# Altium PCB Grabber_DIOT.PCBDOC (part 4 of 7)
Units mm, origin at the board's own origin, x right, y up, seen from the top; angles counter-clockwise.
Board outline 222.9 x 100 mm, 4 copper layers (L1, P2, P3, L4), stack 1.6 mm thick; 235 components, 180 nets, 1032 pads, 664 vias.
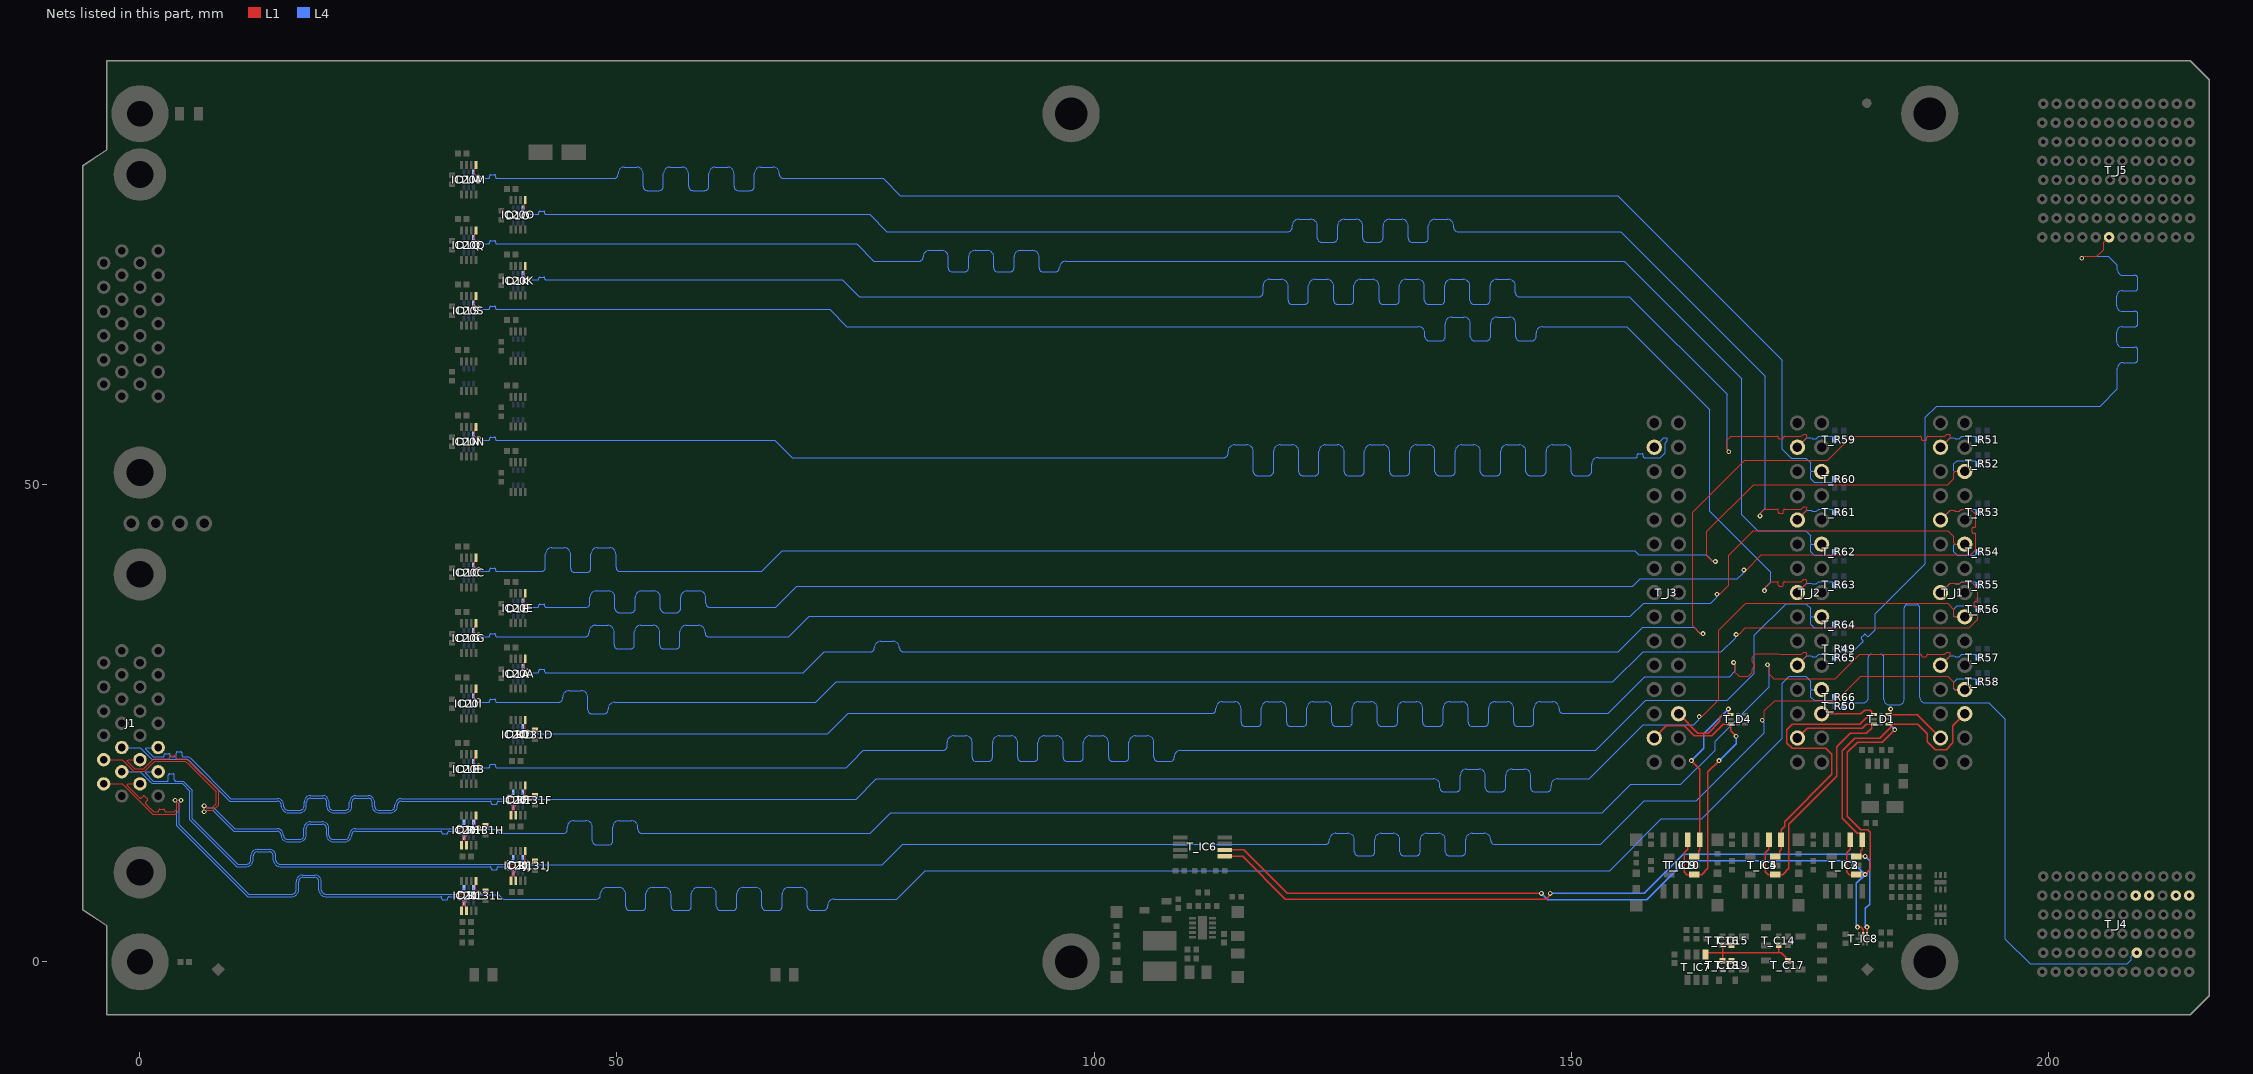
[diagram p5: the nets of this part, all layers, seen from the top]

## Via types
v1: diameter 0.5, hole 0.25, L1 to L4, tented both sides, 661 vias
v2: diameter 0.5, hole 0.25, L1 to L4, 3 vias

## Nets (pads, with @x,y where several pads share a name; then routed paths per layer and width w, separated by ;. In a path a pad name is that pad's centre, name@x,y a point inside that pad or via, vN(x,y) a via of type N, cw(c..) or ccw(c..) an arc to the next point about the centre after c; other vN are vias at no path point) (continued)
BP_IO.LVDS_P14: T_J5.G1 T_R49.1 | length 83.2
  L1 w0.127: v1(203.531,73.752) 203.606,73.752 203.792,73.937 204.092,73.937 204.093,73.936 205.115,73.936 205.827,74.648 205.827,75.377 205.852,75.402 T_J5.G1@206.4,75.95
  L4 w0.127: T_R49.1@178.608,32.82 178.835,32.593 178.835,32.551 178.909,32.477 179.549,32.477 180.545,33.472 180.589,33.517 ccw(c180.5,33.607) 180.589,33.697 180.445,33.841 cw(c180.534,33.93) 180.445,34.019 180.711,34.285 cw(c180.8,34.196) 180.888,34.285 181.033,34.14 ccw(c181.123,34.23) 181.212,34.14 181.617,34.545 181.897,34.824 181.897,36.498 187.121,41.722 187.121,57.068 188.313,58.26 205.495,58.26 207.28,60.045 207.28,60.946 207.28,62.228 cw(c207.859,62.228) 207.859,62.807 209.095,62.807 ccw(c209.095,63.132) 209.421,63.132 209.421,64.109 ccw(c209.095,64.109) 209.095,64.434 207.774,64.434 cw(c207.774,65.013) 207.194,65.013 207.194,65.99 cw(c207.774,65.99) 207.774,66.569 209.095,66.569 ccw(c209.095,66.894) 209.421,66.894 209.421,67.871 ccw(c209.095,67.871) 209.095,68.196 207.774,68.196 cw(c207.774,68.775) 207.194,68.775 207.194,69.752 cw(c207.774,69.752) 207.774,70.331 209.095,70.331 ccw(c209.095,70.656) 209.421,70.656 209.421,71.633 ccw(c209.095,71.633) 209.095,71.958 207.859,71.958 cw(c207.859,72.537) 207.28,72.537 207.28,72.728 207.28,72.99 206.333,73.937 203.792,73.937 203.606,73.752 v1(203.531,73.752)
BP_IO.LVDS_P15: T_J4.E2 T_R50.2 | length 86
  L4 w0.127: T_R50.2@178.608,26.801 178.835,27.027 178.835,27.069 178.909,27.143 180.394,27.143 180.585,27.143 ccw(c180.585,27.722) 181.164,27.722 181.164,31.916 cw(c181.489,31.916) 181.489,32.242 182.466,32.242 cw(c182.466,31.916) 182.791,31.916 182.791,27.515 ccw(c183.37,27.515) 183.37,26.936 184.347,26.936 ccw(c184.347,27.515) 184.926,27.515 184.926,37.095 cw(c185.251,37.095) 185.251,37.42 186.228,37.42 cw(c186.228,37.095) 186.553,37.095 186.553,27.722 ccw(c187.132,27.722) 187.132,27.143 187.885,27.143 193.809,27.143 195.512,25.441 195.512,2.384 198.117,-0.221 208.285,-0.221 208.727,0.222 208.727,0.476 208.727,0.581 209.096,0.95 T_J4.E2@209.3,0.95
BP_MGT_Rx_N: T_J4.E5
BP_MGT_Rx_P: T_J4.D5
BP_MGT_Tx_N: T_J4.B5
BP_MGT_Tx_P: T_J4.A5
CC0_N: D1F.6 IC20F.5 J1.18 | length 52
  L1 w0.127: v1(38.625,16.665) 38.7,16.665 38.886,16.851 39.061,16.851 39.135,16.777 39.135,16.41 39.001,16.275 39.001,15.76 38.88,15.639 IC20F.5@38.88,15.364
  L4 w0.127: J1.18@-1.905,22.46 0.048,22.46 1.202,21.307 1.276,21.232 5.031,21.232 9.413,16.851 11.819,16.851 14.39,16.851 cw(c14.39,16.426) 14.816,16.426 14.816,16.318 ccw(c15.495,16.318) 15.495,15.639 16.771,15.639 ccw(c16.771,16.318) 17.451,16.318 17.451,16.735 cw(c17.876,16.735) 17.876,17.161 19.152,17.161 cw(c19.152,16.735) 19.578,16.735 19.578,16.318 ccw(c20.257,16.318) 20.257,15.639 21.533,15.639 ccw(c21.533,16.318) 22.213,16.318 22.213,16.735 cw(c22.638,16.735) 22.638,17.161 23.914,17.161 cw(c23.914,16.735) 24.34,16.735 24.34,16.318 ccw(c25.019,16.318) 25.019,15.639 26.295,15.639 ccw(c26.295,16.318) 26.975,16.318 26.975,16.426 cw(c27.4,16.426) 27.4,16.851 28.723,16.851 36.318,16.851 36.689,16.851 cw(c36.689,16.724) 36.816,16.724 36.816,16.629 ccw(c36.941,16.629) 36.941,16.504 37.317,16.504 ccw(c37.317,16.629) 37.443,16.629 37.443,16.724 cw(c37.57,16.724) 37.57,16.851 37.633,16.851 38.364,16.851 38.55,16.665 v1(38.625,16.665) 38.726,16.665 38.982,16.409 39.041,16.409 39.128,16.322 D1F.6@39.128,16.187
CC0_P: D1F.1 IC20F.6 J1.5 | length 52
  L1 w0.127: v1(38.625,17.291) 38.7,17.291 38.886,17.105 39.166,17.105 39.389,16.882 39.389,16.304 39.255,16.17 39.255,15.765 39.38,15.639 IC20F.6@39.38,15.364
  L4 w0.127: J1.5@1.905,22.46 0.662,22.46 0.587,22.386 0.587,22.28 1.381,21.486 2.143,21.486 2.406,21.486 ccw(c2.406,21.613) 2.533,21.613 2.533,21.704 cw(c2.659,21.704) 2.659,21.829 3.035,21.829 cw(c3.035,21.704) 3.16,21.704 3.16,21.612 ccw(c3.286,21.612) 3.286,21.486 3.662,21.486 ccw(c3.662,21.612) 3.787,21.612 3.787,21.88 cw(c3.913,21.88) 3.913,22.005 4.289,22.005 cw(c4.289,21.88) 4.414,21.88 4.414,21.613 ccw(c4.541,21.613) 4.541,21.486 5.136,21.486 5.359,21.264 9.518,17.105 11.819,17.105 14.39,17.105 cw(c14.39,16.426) 15.07,16.426 15.07,16.318 ccw(c15.495,16.318) 15.495,15.893 16.771,15.893 ccw(c16.771,16.318) 17.197,16.318 17.197,16.735 cw(c17.876,16.735) 17.876,17.415 19.152,17.415 cw(c19.152,16.735) 19.832,16.735 19.832,16.318 ccw(c20.257,16.318) 20.257,15.893 21.533,15.893 ccw(c21.533,16.318) 21.959,16.318 21.959,16.735 cw(c22.638,16.735) 22.638,17.415 23.914,17.415 cw(c23.914,16.735) 24.594,16.735 24.594,16.318 ccw(c25.019,16.318) 25.019,15.893 26.295,15.893 ccw(c26.295,16.318) 26.721,16.318 26.721,16.426 cw(c27.4,16.426) 27.4,17.105 28.723,17.105 38.364,17.105 38.55,17.291 v1(38.625,17.291) 38.726,17.291 38.981,17.546 39.041,17.546 39.128,17.632 D1F.1@39.128,17.767
CC1_N: D1H.6 IC20H.5 J1.4 | length 52
  L1 w0.127: J1.4@0,21.19 -1.243,21.19 -1.318,21.116 -1.318,21.01 -0.524,20.216 0.388,20.216 1.467,21.296 2.641,21.296 2.978,21.296 ccw(c2.978,21.423) 3.105,21.423 3.105,21.49 cw(c3.231,21.49) 3.231,21.616 3.607,21.616 cw(c3.607,21.49) 3.732,21.49 3.732,21.423 ccw(c3.859,21.423) 3.859,21.296 4.55,21.296 4.864,21.296 8.251,17.909 8.251,16.48 7.675,15.904 6.98,15.904 6.795,15.719 v1(6.719,15.719) ; v1(33.463,13.521) 33.538,13.521 33.724,13.707 33.898,13.707 33.973,13.633 33.973,13.266 33.838,13.131 33.838,12.616 33.718,12.496 IC20H.5@33.718,12.221
  L4 w0.127: v1(6.719,15.719) 6.795,15.719 6.98,15.904 7.635,15.904 9.832,13.707 11.792,13.707 14.363,13.707 cw(c14.363,13.282) 14.789,13.282 14.789,13.27 ccw(c15.468,13.27) 15.468,12.591 16.744,12.591 ccw(c16.744,13.27) 17.424,13.27 17.424,13.993 cw(c17.849,13.993) 17.849,14.419 19.125,14.419 cw(c19.125,13.993) 19.551,13.993 19.551,13.27 ccw(c20.23,13.27) 20.23,12.591 21.506,12.591 ccw(c21.506,13.27) 22.186,13.27 22.186,13.282 cw(c22.611,13.282) 22.611,13.707 27.766,13.707 31.156,13.707 31.526,13.707 cw(c31.526,13.58) 31.653,13.58 31.653,13.534 ccw(c31.778,13.534) 31.778,13.408 32.155,13.408 ccw(c32.155,13.534) 32.28,13.534 32.28,13.58 cw(c32.407,13.58) 32.407,13.707 32.47,13.707 33.202,13.707 33.388,13.521 v1(33.463,13.521) 33.564,13.521 33.82,13.265 33.879,13.265 33.965,13.179 D1H.6@33.965,13.044
CC1_P: D1H.1 IC20H.6 J1.17 | length 52
  L1 w0.127: J1.17@-3.81,21.19 -1.857,21.19 -0.703,20.037 -0.629,19.962 0.493,19.962 1.573,21.042 4.759,21.042 5.095,20.705 7.997,17.804 7.997,16.585 7.57,16.158 6.98,16.158 6.795,16.344 v1(6.719,16.344) ; v1(33.463,14.147) 33.538,14.147 33.724,13.961 34.004,13.961 34.227,13.738 34.227,13.161 34.092,13.026 34.092,12.621 34.218,12.496 IC20H.6@34.218,12.221
  L4 w0.127: v1(6.719,16.344) 6.795,16.344 6.98,16.158 7.74,16.158 9.938,13.961 11.792,13.961 14.363,13.961 cw(c14.363,13.282) 15.043,13.282 15.043,13.27 ccw(c15.468,13.27) 15.468,12.845 16.744,12.845 ccw(c16.744,13.27) 17.17,13.27 17.17,13.993 cw(c17.849,13.993) 17.849,14.673 19.125,14.673 cw(c19.125,13.993) 19.805,13.993 19.805,13.27 ccw(c20.23,13.27) 20.23,12.845 21.506,12.845 ccw(c21.506,13.27) 21.932,13.27 21.932,13.282 cw(c22.611,13.282) 22.611,13.961 27.766,13.961 33.202,13.961 33.388,14.147 v1(33.463,14.147) 33.564,14.147 33.819,14.402 33.879,14.402 33.965,14.489 D1H.1@33.965,14.624
CC2_N: D1J.6 IC20J.5 J1.16 | length 52
  L1 w0.127: v1(38.625,9.801) 38.7,9.801 38.886,9.987 39.061,9.987 39.135,9.913 39.135,9.546 39.001,9.411 39.001,8.896 38.88,8.776 IC20J.5@38.88,8.501
  L4 w0.127: J1.16@-1.905,19.92 0.048,19.92 1.202,18.767 1.276,18.692 4.417,18.692 5.237,17.873 5.237,14.874 10.124,9.987 10.992,9.987 11.182,9.987 ccw(c11.182,10.666) 11.862,10.666 11.862,11.095 cw(c12.287,11.095) 12.287,11.52 13.563,11.52 cw(c13.563,11.095) 13.989,11.095 13.989,10.666 ccw(c14.668,10.666) 14.668,9.987 15.676,9.987 36.318,9.987 36.689,9.987 cw(c36.689,9.86) 36.816,9.86 36.816,9.765 ccw(c36.941,9.765) 36.941,9.64 37.317,9.64 ccw(c37.317,9.765) 37.443,9.765 37.443,9.86 cw(c37.57,9.86) 37.57,9.987 37.633,9.987 38.364,9.987 38.55,9.801 v1(38.625,9.801) 38.726,9.801 38.982,9.545 39.041,9.545 39.128,9.459 D1J.6@39.128,9.324
CC2_P: D1J.1 IC20J.6 J1.3 | length 52
  L1 w0.127: v1(38.625,10.427) 38.7,10.427 38.886,10.241 39.166,10.241 39.389,10.018 39.389,9.441 39.255,9.306 39.255,8.901 39.38,8.776 IC20J.6@39.38,8.501
  L4 w0.127: J1.3@1.905,19.92 0.662,19.92 0.587,19.846 0.587,19.74 1.381,18.946 2.66,18.946 2.853,18.946 ccw(c2.853,19.073) 2.98,19.073 2.98,19.571 cw(c3.105,19.571) 3.105,19.696 3.481,19.696 cw(c3.481,19.571) 3.607,19.571 3.607,19.073 ccw(c3.734,19.073) 3.734,18.946 4.424,18.946 4.522,18.946 5.491,17.978 5.491,14.979 5.703,14.767 10.229,10.241 10.992,10.241 11.182,10.241 ccw(c11.182,10.666) 11.608,10.666 11.608,11.095 cw(c12.287,11.095) 12.287,11.774 13.563,11.774 cw(c13.563,11.095) 14.243,11.095 14.243,10.666 ccw(c14.668,10.666) 14.668,10.241 15.676,10.241 38.364,10.241 38.55,10.427 v1(38.625,10.427) 38.726,10.427 38.981,10.682 39.041,10.682 39.128,10.769 D1J.1@39.128,10.904
CC3_N: D1L.6 IC20L.5 J1.2 | length 52
  L1 w0.127: J1.2@0,18.65 -1.243,18.65 -1.318,18.576 -1.318,18.47 -0.316,17.468 -0.271,17.424 -0.036,17.188 ccw(c0.054,17.278) 0.144,17.188 0.323,17.367 cw(c0.412,17.279) 0.5,17.367 0.766,17.101 cw(c0.678,17.013) 0.766,16.924 0.587,16.745 ccw(c0.677,16.655) 0.587,16.565 1.031,16.122 1.076,16.077 1.434,15.719 1.778,15.719 1.841,15.719 ccw(c1.841,15.846) 1.968,15.846 1.968,15.888 cw(c2.094,15.888) 2.094,16.014 2.47,16.014 cw(c2.47,15.888) 2.595,15.888 2.595,15.846 ccw(c2.722,15.846) 2.722,15.719 3.192,15.719 3.59,15.719 3.864,15.993 3.864,16.683 3.679,16.869 v1(3.679,16.944) ; v1(33.463,6.658) 33.538,6.658 33.724,6.843 33.898,6.843 33.973,6.769 33.973,6.402 33.838,6.267 33.838,5.752 33.718,5.632 IC20L.5@33.718,5.357
  L4 w0.127: v1(3.679,16.944) 3.679,16.869 3.864,16.683 3.864,14.264 11.285,6.843 15.758,6.843 15.949,6.843 ccw(c15.949,7.523) 16.628,7.523 16.628,8.418 cw(c17.053,8.418) 17.053,8.844 18.33,8.844 cw(c18.33,8.418) 18.755,8.418 18.755,7.523 ccw(c19.434,7.523) 19.434,6.843 20.332,6.843 31.156,6.843 31.526,6.843 cw(c31.526,6.716) 31.653,6.716 31.653,6.622 ccw(c31.778,6.622) 31.778,6.496 32.155,6.496 ccw(c32.155,6.622) 32.28,6.622 32.28,6.716 cw(c32.407,6.716) 32.407,6.843 32.47,6.843 33.202,6.843 33.388,6.658 v1(33.463,6.658) 33.564,6.658 33.82,6.401 33.879,6.401 33.965,6.315 D1L.6@33.965,6.18
CC3_P: D1L.1 IC20L.6 J1.15 | length 52
  L1 w0.127: J1.15@-3.81,18.65 -1.857,18.65 -1.332,18.125 -0.253,17.047 1.329,15.465 3.695,15.465 4.118,15.888 4.118,16.683 4.304,16.869 v1(4.304,16.944) ; v1(33.463,7.283) 33.538,7.283 33.724,7.097 34.004,7.097 34.227,6.874 34.227,6.297 34.092,6.162 34.092,5.757 34.218,5.632 IC20L.6@34.218,5.357
  L4 w0.127: v1(4.304,16.944) 4.304,16.869 4.118,16.683 4.118,14.369 11.39,7.097 15.758,7.097 15.949,7.097 ccw(c15.949,7.523) 16.374,7.523 16.374,8.418 cw(c17.053,8.418) 17.053,9.098 18.33,9.098 cw(c18.33,8.418) 19.009,8.418 19.009,7.523 ccw(c19.434,7.523) 19.434,7.097 20.332,7.097 33.202,7.097 33.388,7.283 v1(33.463,7.283) 33.564,7.283 33.819,7.538 33.879,7.538 33.965,7.625 D1L.1@33.965,7.76
CT: T_C14.2 T_C15.2 T_C16.2 T_C17.2 T_C18.2 T_C19.2 T_IC7.4 | length 13.5
  L1 w0.152: T_IC7.4@164.101,0.925 165.891,0.925 ; T_C19.2@166.841,0.086 T_C18.2@165.891,0.086 165.891,0.925 ; T_C15.2@166.841,1.763 T_C16.2@165.891,1.763 165.891,0.925 ; 171.775,0.925 165.891,0.925 ; T_C14.2@171.775,1.763 171.775,0.928 172.063,0.928 172.496,0.495 172.496,0.315 T_C17.2@172.726,0.086
EEM0_I2C.SCL: T_D1.3 T_IC2.1 T_IC3.6 T_IC6.2 T_IC8.3 T_J1.27 | length 114.2
  L1 w0.152: T_IC6.2@113.693,11.729 115.711,11.729 120.266,7.173 v1(146.894,7.173) ; 178.952,15.243 178.952,21.962 180.03,23.039 182.639,23.039 v1(183.945,24.345) ; 178.956,15.24 180.353,13.843 181.086,13.843 181.367,13.562 181.367,9.688 v1(180.826,9.147) T_IC2.1@179.921,9.147 179.166,9.147 178.893,9.42 178.893,11.413 179.256,11.777 T_IC3.6@179.256,12.797 ; v1(180.023,3.637) 180.057,3.604 180.408,3.604 180.629,3.383 T_IC8.3@180.629,2.859 ; T_D1.3@183.26,25.921 T_D1.3@183.421,25.921 ; v1(183.495,26.497) 183.495,25.995 T_D1.3@183.421,25.921 ; T_J1.27@188.73,23.46 186.269,25.921 T_D1.3@183.421,25.921
  L4 w0.152: v1(146.894,7.173) 147.546,6.522 157.955,6.522 162.03,10.596 179.377,10.596 v1(180.826,9.147) 179.896,8.217 v1@179.896,3.637 ; v1(183.495,26.497) v1(183.495,26.497) 183.494,24.796 v1(183.945,24.345)
EEM0_I2C.SDA: T_D1.1 T_IC2.3 T_IC3.5 T_IC6.1 T_IC8.2 T_J1.26 | length 111.3
  L1 w0.152: T_IC6.1@113.693,11.079 115.569,11.079 120.066,6.581 147.385,6.581 v1@147.83,7.026 ; T_IC2.3@179.921,11.047 T_IC2.3@180.171,11.047 ; v1(180.826,11.047) T_IC2.3@180.171,11.047 ; T_IC8.2@181.031,2.905 v1(181.031,3.637) ; T_D1.1@183.26,24.921 T_D1.1@183.421,24.921 ; T_J1.26@191.27,26 190.024,24.754 190.024,22.948 189.319,22.244 188.201,22.244 187.359,23.086 187.359,23.929 186.366,24.921 T_D1.1@183.421,24.921 ; T_IC2.3@180.171,11.047 180.394,11.271 180.394,11.619 180.526,11.75 T_IC3.5@180.526,12.797 180.526,13.272 180.302,13.496 179.986,13.496 178.447,15.034 178.447,22.144 179.751,23.448 182.357,23.448 183.495,24.586 183.495,24.847 T_D1.1@183.421,24.921
  L4 w0.152: v1(147.83,7.173) 157.672,7.173 161.749,11.251 179.679,11.251 179.883,11.047 v1(180.826,11.047) 181.302,10.571 181.302,6.057 180.863,5.618 v1@180.863,3.637
EEM1_I2C.SCL: T_D1.6 T_IC4.1 T_IC5.6 T_J2.27 | length 34.7
  L1 w0.152: T_IC5.6@170.747,12.797 170.747,11.777 170.384,11.413 170.384,9.42 170.657,9.147 T_IC4.1@171.412,9.147 172.196,9.147 172.842,9.793 172.842,14.446 177.832,19.435 177.832,22.522 179.262,23.952 180.958,23.952 181.501,24.495 181.501,24.847 T_D1.6@181.575,24.921 ; T_J2.27@173.73,23.46 174.762,24.492 180.523,24.492 180.952,24.921 T_D1.6@181.575,24.921 ; T_D1.6@181.74,24.921 T_D1.6@181.575,24.921
EEM1_I2C.SDA: T_D1.4 T_IC4.3 T_IC5.5 T_J2.26 | length 35.5
  L1 w0.152: T_IC4.3@171.412,11.047 171.662,11.047 171.885,11.271 171.885,11.619 172.017,11.75 T_IC5.5@172.017,12.797 172.017,13.843 172.393,14.219 172.393,14.699 177.343,19.65 177.343,21.749 176.717,22.375 173.172,22.375 172.615,22.932 172.615,24.345 173.191,24.921 180.267,24.921 181.267,25.921 T_D1.4@181.575,25.921 ; T_J2.26@176.27,26 176.289,25.981 180.395,25.981 180.776,26.362 181.367,26.362 181.501,26.229 181.501,25.995 T_D1.4@181.575,25.921 ; T_D1.4@181.74,25.921 T_D1.4@181.575,25.921
EEM2_I2C.SCL: T_D4.6 T_IC9.1 T_IC10.6 T_J3.27 | length 32.4
  L1 w0.152: T_J3.27@158.73,23.46 159.993,24.723 161.89,24.723 162.929,23.684 164.728,23.684 165.964,24.921 T_D4.6@166.739,24.921 166.739,24.2 v1(167.302,23.638) ; T_IC10.6@162.238,12.797 162.238,11.777 161.875,11.413 161.875,9.42 162.148,9.147 T_IC9.1@162.903,9.147 163.687,9.147 164.333,9.793 164.333,19.905 v1(165.516,21.088)
  L4 w0.152: v1(165.516,21.088) 167.302,22.874 v1(167.302,23.638)
EEM2_I2C.SDA: T_D4.4 T_IC9.3 T_IC10.5 T_J3.26 | length 25.8
  L1 w0.152: T_J3.26@161.27,26 163.294,23.976 164.367,23.976 165.582,25.191 165.582,25.62 165.883,25.921 T_D4.4@166.574,25.921 ; v1(162.617,21.088) 163.508,20.197 T_IC10.5@163.508,12.797 163.508,11.75 163.376,11.619 163.376,11.271 163.153,11.047 T_IC9.3@162.903,11.047 ; v1(166.501,26.497) 166.501,25.995 T_D4.4@166.574,25.921 ; T_D4.4@166.739,25.921 T_D4.4@166.574,25.921
  L4 w0.152: v1(162.617,21.088) 163.927,22.398 163.927,23.923 v1(166.501,26.497)
EEM_IO.LVDS_N0: D1A.6 IC20A.5 T_J1.3 T_R51.2 | length 180.9
  L1 w0.127: IC20A.5@40.378,31.78 40.378,31.505 40.257,31.385 40.257,30.87 40.122,30.735 40.122,30.368 40.197,30.294 40.372,30.294 40.558,30.48 v1(40.633,30.48) ; v1(163.831,34.4) 163.777,34.453 163.515,34.453 162.754,35.215 162.754,47.107 168.214,52.567 176.898,52.567 179.414,55.083 186.027,55.083 186.618,55.083 cw(c186.618,54.956) 186.745,54.956 186.745,54.764 ccw(c186.85,54.764) 186.85,54.659 187.167,54.659 ccw(c187.167,54.764) 187.272,54.764 187.272,54.956 cw(c187.399,54.956) 187.399,55.083 187.617,55.083 189.154,55.083 189.391,55.32 189.61,55.32 189.63,55.3 189.731,55.199 189.731,54.941 T_J1.3@188.73,53.94
  L4 w0.127: D1A.6@40.13,30.957 40.13,30.822 40.217,30.736 40.276,30.736 40.532,30.48 v1(40.633,30.48) 40.708,30.48 40.894,30.294 41.625,30.294 41.688,30.294 ccw(c41.688,30.421) 41.815,30.421 41.815,30.516 cw(c41.941,30.516) 41.941,30.641 42.317,30.641 cw(c42.317,30.516) 42.442,30.516 42.442,30.421 ccw(c42.569,30.421) 42.569,30.294 42.939,30.294 69.532,30.294 71.729,32.49 76.358,32.49 76.549,32.49 ccw(c76.549,32.916) 76.974,32.916 cw(c77.653,32.916) 77.653,33.596 78.93,33.596 cw(c78.93,32.916) 79.609,32.916 ccw(c80.034,32.916) 80.034,32.49 81.012,32.49 154.94,32.49 157.504,35.054 162.914,35.054 163.515,34.453 163.777,34.453 v1(163.831,34.4) ; T_J1.3@188.73,53.94 189.731,54.941 190.19,54.941 190.265,54.866 190.285,54.846 190.714,54.846 190.952,55.083 192.367,55.083 192.442,55.009 192.442,54.967 T_R51.2@192.668,54.741
EEM_IO.LVDS_N1: D1C.6 IC20C.5 T_J1.6 T_R52.2 | length 181.1
  L1 w0.127: IC20C.5@35.215,42.414 35.215,42.139 35.095,42.019 35.095,41.504 34.96,41.369 34.96,41.002 35.034,40.928 35.209,40.928 35.395,41.113 v1(35.47,41.113) ; v1(165.135,41.965) 165.082,42.018 165.072,42.008 164.805,42.008 164.245,42.569 164.245,45.108 169.131,49.994 189.485,49.994 190.127,50.636 190.127,51.265 190.262,51.4 T_J1.6@191.27,51.4
  L4 w0.127: D1C.6@34.968,41.591 34.968,41.456 35.054,41.37 35.113,41.37 35.369,41.113 v1(35.47,41.113) 35.545,41.113 35.731,40.928 36.462,40.928 36.526,40.928 ccw(c36.526,41.055) 36.653,41.055 36.653,41.121 cw(c36.778,41.121) 36.778,41.247 37.154,41.247 cw(c37.154,41.121) 37.28,41.121 37.28,41.055 ccw(c37.407,41.055) 37.407,40.928 37.777,40.928 41.889,40.928 42.079,40.928 ccw(c42.079,41.353) 42.504,41.353 42.504,42.725 cw(c43.184,42.725) 43.184,43.405 44.46,43.405 cw(c44.46,42.725) 45.139,42.725 45.139,41.251 ccw(c45.565,41.251) 45.565,40.825 46.841,40.825 ccw(c46.841,41.251) 47.266,41.251 47.266,42.725 cw(c47.946,42.725) 47.946,43.405 49.222,43.405 cw(c49.222,42.725) 49.901,42.725 49.901,41.353 ccw(c50.327,41.353) 50.327,40.928 51.463,40.928 65.163,40.928 67.298,43.062 156.687,43.062 157.105,42.644 164.193,42.644 164.82,42.018 165.082,42.018 v1(165.135,41.965) ; T_J1.6@191.27,51.4 190.201,51.4 190.127,51.474 190.127,52.189 190.481,52.543 192.367,52.543 192.442,52.469 192.442,52.427 T_R52.2@192.668,52.201
EEM_IO.LVDS_N2: D1E.6 IC20E.5 T_J1.9 T_R53.2 | length 180.9
  L1 w0.127: IC20E.5@40.378,38.644 40.378,38.369 40.257,38.249 40.257,37.734 40.122,37.599 40.122,37.232 40.197,37.158 40.372,37.158 40.558,37.343 v1(40.633,37.343) ; v1(168.119,41.069) 168.172,41.122 168.435,41.122 169.962,42.649 191.875,42.649 192.413,43.187 192.413,43.478 192.413,44.795 ccw(c192.286,44.795) 192.286,44.922 192.171,44.922 cw(c192.171,45.048) 192.046,45.048 192.046,45.424 cw(c192.171,45.424) 192.171,45.549 192.286,45.549 ccw(c192.286,45.676) 192.413,45.676 192.413,46.226 192.413,46.923 191.873,47.463 190.952,47.463 190.714,47.226 190.285,47.226 190.265,47.246 190.19,47.321 189.731,47.321 T_J1.9@188.73,46.32
  L4 w0.127: D1E.6@40.13,37.821 40.13,37.686 40.217,37.6 40.276,37.6 40.532,37.343 v1(40.633,37.343) 40.708,37.343 40.894,37.158 41.625,37.158 41.688,37.158 ccw(c41.688,37.285) 41.815,37.285 41.815,37.379 cw(c41.941,37.379) 41.941,37.505 42.317,37.505 cw(c42.317,37.379) 42.442,37.379 42.442,37.285 ccw(c42.569,37.285) 42.569,37.158 42.939,37.158 46.534,37.158 46.724,37.158 ccw(c46.724,37.583) 47.15,37.583 47.15,38.191 cw(c47.829,38.191) 47.829,38.871 49.105,38.871 cw(c49.105,38.191) 49.785,38.191 49.785,37.027 ccw(c50.21,37.027) 50.21,36.602 51.486,36.602 ccw(c51.486,37.027) 51.912,37.027 51.912,38.191 cw(c52.591,38.191) 52.591,38.871 53.867,38.871 cw(c53.867,38.191) 54.547,38.191 54.547,37.027 ccw(c54.972,37.027) 54.972,36.602 56.248,36.602 ccw(c56.248,37.027) 56.674,37.027 56.674,38.191 cw(c57.353,38.191) 57.353,38.871 58.629,38.871 cw(c58.629,38.191) 59.309,38.191 59.309,37.583 ccw(c59.734,37.583) 59.734,37.158 60.974,37.158 66.654,37.158 68.839,39.342 156.458,39.342 157.242,40.127 167.439,40.127 168.066,40.753 168.066,41.015 v1(168.119,41.069) ; T_J1.9@188.73,46.32 189.731,47.321 190.19,47.321 190.265,47.246 190.285,47.226 190.714,47.226 190.952,47.463 192.367,47.463 192.442,47.389 192.442,47.347 T_R53.2@192.668,47.121
EEM_IO.LVDS_N3: D1G.6 IC20G.5 T_J1.12 T_R54.2 | length 181.1
  L1 w0.127: IC20G.5@35.215,35.55 35.215,35.275 35.095,35.155 35.095,34.64 34.96,34.505 34.96,34.138 35.034,34.064 35.209,34.064 35.395,34.25 v1(35.47,34.25) ; v1(165.304,38.526) 165.358,38.58 165.62,38.58 166.524,39.484 166.524,42.61 169.1,45.186 189.485,45.186 190.127,44.544 190.127,43.915 190.262,43.78 T_J1.12@191.27,43.78
  L4 w0.127: D1G.6@34.968,34.727 34.968,34.592 35.054,34.506 35.113,34.506 35.369,34.25 v1(35.47,34.25) 35.545,34.25 35.731,34.064 36.462,34.064 36.526,34.064 ccw(c36.526,34.191) 36.653,34.191 36.653,34.286 cw(c36.778,34.286) 36.778,34.411 37.154,34.411 cw(c37.154,34.286) 37.28,34.286 37.28,34.191 ccw(c37.407,34.191) 37.407,34.064 37.777,34.064 46.452,34.064 46.643,34.064 ccw(c46.643,34.489) 47.068,34.489 47.068,34.596 cw(c47.748,34.596) 47.748,35.276 49.024,35.276 cw(c49.024,34.596) 49.703,34.596 49.703,33.222 ccw(c50.129,33.222) 50.129,32.796 51.405,32.796 ccw(c51.405,33.222) 51.83,33.222 51.83,34.596 cw(c52.51,34.596) 52.51,35.276 53.786,35.276 cw(c53.786,34.596) 54.465,34.596 54.465,33.222 ccw(c54.891,33.222) 54.891,32.796 56.167,32.796 ccw(c56.167,33.222) 56.592,33.222 56.592,34.596 cw(c57.272,34.596) 57.272,35.276 58.548,35.276 cw(c58.548,34.596) 59.227,34.596 59.227,34.489 ccw(c59.653,34.489) 59.653,34.064 61.565,34.064 68.006,34.064 70.141,36.199 156.223,36.199 157.605,37.581 164.621,37.581 165.251,38.211 165.251,38.473 v1(165.304,38.526) ; T_J1.12@191.27,43.78 190.201,43.78 190.127,43.706 190.127,42.991 190.481,42.637 192.367,42.637 192.442,42.711 192.442,42.753 T_R54.2@192.668,42.98
EEM_IO.LVDS_N4: D1I.6 IC20I.5 T_J1.15 T_R55.2 | length 181
  L1 w0.127: IC20I.5@35.215,28.687 35.215,28.412 35.095,28.291 35.095,27.776 34.96,27.641 34.96,27.274 35.034,27.2 35.209,27.2 35.395,27.386 v1(35.47,27.386) ; v1(167.302,34.306) 167.355,34.359 167.618,34.359 168.27,35.012 191.737,35.012 192.638,35.913 192.638,36.957 192.638,37.02 ccw(c192.511,37.02) 192.511,37.147 192.395,37.147 cw(c192.395,37.273) 192.27,37.273 192.27,37.649 cw(c192.395,37.649) 192.395,37.774 192.511,37.774 ccw(c192.511,37.901) 192.638,37.901 192.638,38.797 192.638,39.144 191.939,39.843 190.952,39.843 190.714,39.606 190.285,39.606 190.265,39.626 190.19,39.701 189.731,39.701 T_J1.15@188.73,38.7
  L4 w0.127: D1I.6@34.968,27.864 34.968,27.729 35.054,27.642 35.113,27.642 35.369,27.386 v1(35.47,27.386) 35.545,27.386 35.731,27.2 36.462,27.2 36.526,27.2 ccw(c36.526,27.327) 36.653,27.327 36.653,27.422 cw(c36.778,27.422) 36.778,27.547 37.154,27.547 cw(c37.154,27.422) 37.28,27.422 37.28,27.327 ccw(c37.407,27.327) 37.407,27.2 37.777,27.2 43.69,27.2 43.88,27.2 ccw(c43.88,27.625) 44.306,27.625 44.306,27.733 cw(c44.985,27.733) 44.985,28.412 46.261,28.412 cw(c46.261,27.733) 46.941,27.733 46.941,26.413 ccw(c47.366,26.413) 47.366,25.988 48.642,25.988 ccw(c48.642,26.413) 49.068,26.413 49.068,26.521 cw(c49.747,26.521) 49.747,27.2 51.091,27.2 70.849,27.2 72.984,29.335 154.388,29.335 157.562,32.508 165.766,32.508 167.249,33.99 167.249,34.253 v1(167.302,34.306) ; T_J1.15@188.73,38.7 189.731,39.701 190.19,39.701 190.265,39.626 190.285,39.606 190.714,39.606 190.952,39.843 192.367,39.843 192.442,39.769 192.442,39.727 T_R55.2@192.668,39.501
EEM_IO.LVDS_N5: D1F.3 IC20F.1 R131F.1 T_J1.18 T_R56.2 | length 181.8
  L1 w0.127: IC20F.1@40.38,18.464 40.38,17.481 v1(40.633,17.227) v1(40.633,17.227) 40.633,17.218 41.218,17.218 R131F.1@41.389,17.388 ; v1(163.441,25.708) 163.494,25.761 163.756,25.761 165.479,27.484 165.479,34.744 168.301,37.566 189.485,37.566 190.127,36.924 190.127,36.295 190.262,36.16 T_J1.18@191.27,36.16
  L4 w0.127: D1F.3@40.128,17.767 40.128,17.632 40.214,17.546 40.274,17.546 40.529,17.291 40.655,17.291 40.894,17.052 75.062,17.052 77.19,19.18 130.12,19.18 135.578,19.18 cw(c135.578,18.5) 136.258,18.5 136.258,18.235 ccw(c136.683,18.235) 136.683,17.809 137.959,17.809 ccw(c137.959,18.235) 138.385,18.235 138.385,19.526 cw(c139.064,19.526) 139.064,20.205 140.34,20.205 cw(c140.34,19.526) 141.02,19.526 141.02,18.235 ccw(c141.445,18.235) 141.445,17.809 142.721,17.809 ccw(c142.721,18.235) 143.147,18.235 143.147,19.526 cw(c143.826,19.526) 143.826,20.205 145.102,20.205 cw(c145.102,19.526) 145.782,19.526 145.782,18.235 ccw(c146.207,18.235) 146.207,17.809 147.483,17.809 ccw(c147.483,18.235) 147.909,18.235 147.909,18.5 cw(c148.588,18.5) 148.588,19.18 148.779,19.18 151.898,19.18 157.57,24.852 162.847,24.852 163.387,25.392 163.387,25.654 v1(163.441,25.708) ; T_J1.18@191.27,36.16 190.201,36.16 190.127,36.234 190.127,36.949 190.481,37.303 192.367,37.303 192.442,37.229 192.442,37.187 T_R56.2@192.668,36.961
EEM_IO.LVDS_N6: D1H.3 IC20H.1 R131H.1 T_J1.21 T_R57.2 | length 181.7
  L1 w0.127: IC20H.1@35.218,15.321 35.218,14.337 v1(35.47,14.083) v1(35.47,14.083) 35.47,14.074 36.056,14.074 R131H.1@36.226,14.245 ; v1(170.593,31.13) 170.593,31.054 170.779,30.869 170.779,30.119 171.225,29.672 177.718,29.672 180.268,32.223 186.027,32.223 186.618,32.223 cw(c186.618,32.096) 186.745,32.096 186.745,32.093 ccw(c186.85,32.093) 186.85,31.988 187.167,31.988 ccw(c187.167,32.093) 187.272,32.093 187.272,32.096 cw(c187.399,32.096) 187.399,32.223 187.617,32.223 189.154,32.223 189.391,32.46 189.61,32.46 189.63,32.44 189.731,32.339 189.731,32.081 T_J1.21@188.73,31.08
  L4 w0.127: D1H.3@34.965,14.624 34.965,14.489 35.052,14.402 35.112,14.402 35.367,14.147 35.493,14.147 35.731,13.909 37.294,13.909 37.735,13.468 44.174,13.468 44.365,13.468 ccw(c44.365,13.893) 44.79,13.893 44.79,14.114 cw(c45.469,14.114) 45.469,14.793 46.746,14.793 cw(c46.746,14.114) 47.425,14.114 47.425,12.681 ccw(c47.85,12.681) 47.85,12.256 49.127,12.256 ccw(c49.127,12.681) 49.552,12.681 49.552,14.114 cw(c50.231,14.114) 50.231,14.793 51.508,14.793 cw(c51.508,14.114) 52.187,14.114 52.187,13.893 ccw(c52.612,13.893) 52.612,13.468 55.53,13.468 76.53,13.468 78.67,15.607 153.276,15.607 156.278,18.609 161.526,18.609 165.106,22.189 165.106,23.145 170.779,28.817 170.779,30.869 170.593,31.054 v1(170.593,31.13) ; T_J1.21@188.73,31.08 189.731,32.081 190.19,32.081 190.265,32.006 190.285,31.986 190.714,31.986 190.952,32.223 192.367,32.223 192.442,32.149 192.442,32.107 T_R57.2@192.668,31.881
EEM_IO.LVDS_N7: D1J.3 IC20J.1 R131J.1 T_J1.24 T_R58.2 | length 181.8
  L1 w0.127: IC20J.1@40.38,11.601 40.38,10.617 40.633,10.364 v1(40.633,10.363) 40.633,10.354 41.218,10.354 R131J.1@41.389,10.524 ; v1(170.056,25.314) 170.056,25.389 170.241,25.575 170.241,26.298 171.333,27.39 177.798,27.39 180.354,29.946 189.485,29.946 190.127,29.304 190.127,28.675 190.262,28.54 T_J1.24@191.27,28.54
  L4 w0.127: D1J.3@40.128,10.904 40.128,10.769 40.214,10.682 40.274,10.682 40.529,10.427 40.655,10.427 40.894,10.188 77.8,10.188 79.928,12.316 124.049,12.316 124.24,12.316 ccw(c124.24,12.741) 124.665,12.741 124.665,12.791 cw(c125.345,12.791) 125.345,13.47 126.621,13.47 cw(c126.621,12.791) 127.3,12.791 127.3,11.529 ccw(c127.726,11.529) 127.726,11.104 129.002,11.104 ccw(c129.002,11.529) 129.427,11.529 129.427,12.791 cw(c130.107,12.791) 130.107,13.47 131.383,13.47 cw(c131.383,12.791) 132.062,12.791 132.062,11.529 ccw(c132.488,11.529) 132.488,11.104 133.764,11.104 ccw(c133.764,11.529) 134.189,11.529 134.189,12.791 cw(c134.869,12.791) 134.869,13.47 136.145,13.47 cw(c136.145,12.791) 136.824,12.791 136.824,11.529 ccw(c137.25,11.529) 137.25,11.104 138.526,11.104 ccw(c138.526,11.529) 138.951,11.529 138.951,12.791 cw(c139.631,12.791) 139.631,13.47 140.907,13.47 cw(c140.907,12.791) 141.586,12.791 141.586,12.741 ccw(c142.012,12.741) 142.012,12.316 144.284,12.316 153.108,12.316 157.658,16.866 163.118,16.866 170.241,23.989 170.241,25.053 170.056,25.239 v1(170.056,25.314) ; T_J1.24@191.27,28.54 190.201,28.54 190.127,28.614 190.127,29.329 190.481,29.683 192.367,29.683 192.442,29.609 192.442,29.567 T_R58.2@192.668,29.341
EEM_IO.LVDS_N8: D1K.6 IC20K.5 T_J2.3 T_R59.2 | length 181
  L1 w0.127: IC20K.5@40.378,72.963 40.378,72.688 40.257,72.568 40.257,72.053 40.122,71.918 40.122,71.551 40.197,71.477 40.372,71.477 40.558,71.662 v1(40.633,71.662) ; v1(166.537,53.476) 166.537,53.552 166.53,53.552 166.345,53.737 166.345,54.647 166.781,55.083 171.027,55.083 171.618,55.083 cw(c171.618,54.956) 171.745,54.956 171.745,54.908 ccw(c171.85,54.908) 171.85,54.803 172.167,54.803 ccw(c172.167,54.908) 172.272,54.908 172.272,54.956 cw(c172.399,54.956) 172.399,55.083 172.617,55.083 174.154,55.083 174.391,55.32 174.61,55.32 174.63,55.3 174.731,55.199 174.731,54.941 T_J2.3@173.73,53.94
  L4 w0.127: D1K.6@40.13,72.14 40.13,72.005 40.217,71.919 40.276,71.919 40.532,71.662 v1(40.633,71.662) 40.708,71.662 40.894,71.477 41.625,71.477 41.688,71.477 ccw(c41.688,71.604) 41.815,71.604 41.815,71.654 cw(c41.941,71.654) 41.941,71.779 42.317,71.779 cw(c42.317,71.654) 42.442,71.654 42.442,71.604 ccw(c42.569,71.604) 42.569,71.477 42.939,71.477 73.629,71.477 75.392,69.714 117.101,69.714 117.292,69.714 ccw(c117.292,70.139) 117.717,70.139 117.717,70.857 cw(c118.396,70.857) 118.396,71.536 119.673,71.536 cw(c119.673,70.857) 120.352,70.857 120.352,69.343 ccw(c120.777,69.343) 120.777,68.917 122.054,68.917 ccw(c122.054,69.343) 122.479,69.343 122.479,70.857 cw(c123.158,70.857) 123.158,71.536 124.435,71.536 cw(c124.435,70.857) 125.114,70.857 125.114,69.343 ccw(c125.539,69.343) 125.539,68.917 126.816,68.917 ccw(c126.816,69.343) 127.241,69.343 127.241,70.857 cw(c127.92,70.857) 127.92,71.536 129.197,71.536 cw(c129.197,70.857) 129.876,70.857 129.876,69.343 ccw(c130.301,69.343) 130.301,68.917 131.578,68.917 ccw(c131.578,69.343) 132.003,69.343 132.003,70.857 cw(c132.682,70.857) 132.682,71.536 133.959,71.536 cw(c133.959,70.857) 134.638,70.857 134.638,69.343 ccw(c135.063,69.343) 135.063,68.917 136.34,68.917 ccw(c136.34,69.343) 136.765,69.343 136.765,70.857 cw(c137.444,70.857) 137.444,71.536 138.721,71.536 cw(c138.721,70.857) 139.4,70.857 139.4,69.343 ccw(c139.825,69.343) 139.825,68.917 141.102,68.917 ccw(c141.102,69.343) 141.527,69.343 141.527,70.857 cw(c142.206,70.857) 142.206,71.536 143.483,71.536 cw(c143.483,70.857) 144.162,70.857 144.162,70.139 ccw(c144.587,70.139) 144.587,69.714 148.907,69.714 156.113,69.714 166.352,59.475 166.352,53.737 166.537,53.552 v1(166.537,53.476) ; T_J2.3@173.73,53.94 174.731,54.941 175.19,54.941 175.265,54.866 175.285,54.846 175.714,54.846 175.952,55.083 177.367,55.083 177.442,55.009 177.442,54.967 T_R59.2@177.668,54.741
EEM_IO.LVDS_N9: D1M.6 IC20M.5 T_J2.6 T_R60.2 | length 180
  L1 w0.127: IC20M.5@35.215,83.597 35.215,83.322 35.095,83.202 35.095,82.687 34.96,82.552 34.96,82.185 35.034,82.11 35.209,82.11 35.395,82.296 v1(35.47,82.296)
  L4 w0.127: D1M.6@34.968,82.774 34.968,82.639 35.054,82.552 35.113,82.552 35.369,82.296 v1(35.47,82.296) 35.545,82.296 35.731,82.11 36.462,82.11 36.526,82.11 ccw(c36.526,82.237) 36.653,82.237 36.653,82.373 cw(c36.778,82.373) 36.778,82.499 37.154,82.499 cw(c37.154,82.373) 37.28,82.373 37.28,82.237 ccw(c37.407,82.237) 37.407,82.11 37.777,82.11 49.49,82.11 49.681,82.11 ccw(c49.681,82.536) 50.106,82.536 50.106,82.623 cw(c50.786,82.623) 50.786,83.303 52.062,83.303 cw(c52.062,82.623) 52.741,82.623 52.741,81.272 ccw(c53.167,81.272) 53.167,80.847 54.443,80.847 ccw(c54.443,81.272) 54.868,81.272 54.868,82.623 cw(c55.548,82.623) 55.548,83.303 56.824,83.303 cw(c56.824,82.623) 57.503,82.623 57.503,81.272 ccw(c57.929,81.272) 57.929,80.847 59.205,80.847 ccw(c59.205,81.272) 59.63,81.272 59.63,82.623 cw(c60.31,82.623) 60.31,83.303 61.586,83.303 cw(c61.586,82.623) 62.265,82.623 62.265,81.272 ccw(c62.691,81.272) 62.691,80.847 63.967,80.847 ccw(c63.967,81.272) 64.392,81.272 64.392,82.623 cw(c65.072,82.623) 65.072,83.303 66.348,83.303 cw(c66.348,82.623) 67.027,82.623 67.027,82.536 ccw(c67.453,82.536) 67.453,82.11 68.647,82.11 77.886,82.11 79.7,80.297 80.138,80.297 154.89,80.297 154.964,80.223 172.157,63.03 172.157,53.71 173.07,52.797 174.624,52.797 175.127,52.294 175.127,51.474 175.201,51.4 ; T_J2.6@176.27,51.4 175.201,51.4 ; T_R60.2@177.668,50.6 177.442,50.373 177.442,50.331 177.367,50.257 175.481,50.257 175.127,50.611 175.127,51.326 175.201,51.4
EEM_IO.LVDS_N10: D1O.6 IC20O.5 T_J2.9 T_R61.2 | length 180.9
  L1 w0.127: IC20O.5@40.378,79.827 40.378,79.552 40.257,79.431 40.257,78.916 40.122,78.782 40.122,78.415 40.197,78.34 40.372,78.34 40.558,78.526 v1(40.633,78.526) ; v1(169.809,46.741) 169.863,46.794 169.863,47.057 170.269,47.463 171.027,47.463 171.618,47.463 cw(c171.618,47.336) 171.745,47.336 171.745,47.106 ccw(c171.85,47.106) 171.85,47 172.167,47 ccw(c172.167,47.106) 172.272,47.106 172.272,47.336 cw(c172.399,47.336) 172.399,47.463 172.617,47.463 174.154,47.463 174.391,47.7 174.61,47.7 174.63,47.68 174.731,47.579 174.731,47.321 T_J2.9@173.73,46.32
  L4 w0.127: D1O.6@40.13,79.004 40.13,78.869 40.217,78.782 40.276,78.782 40.532,78.526 v1(40.633,78.526) 40.708,78.526 40.894,78.34 41.625,78.34 41.688,78.34 ccw(c41.688,78.467) 41.815,78.467 41.815,78.562 cw(c41.941,78.562) 41.941,78.688 42.317,78.688 cw(c42.317,78.562) 42.442,78.562 42.442,78.467 ccw(c42.569,78.467) 42.569,78.34 42.939,78.34 76.472,78.34 78.277,76.536 118.082,76.536 120.348,76.536 ccw(c120.348,76.961) 120.773,76.961 120.773,77.153 cw(c121.452,77.153) 121.452,77.832 122.729,77.832 cw(c122.729,77.153) 123.408,77.153 123.408,75.856 ccw(c123.833,75.856) 123.833,75.431 125.11,75.431 ccw(c125.11,75.856) 125.535,75.856 125.535,77.153 cw(c126.214,77.153) 126.214,77.832 127.491,77.832 cw(c127.491,77.153) 128.17,77.153 128.17,75.856 ccw(c128.595,75.856) 128.595,75.431 129.872,75.431 ccw(c129.872,75.856) 130.297,75.856 130.297,77.153 cw(c130.976,77.153) 130.976,77.832 132.253,77.832 cw(c132.253,77.153) 132.932,77.153 132.932,75.856 ccw(c133.357,75.856) 133.357,75.431 134.634,75.431 ccw(c134.634,75.856) 135.059,75.856 135.059,77.153 cw(c135.738,77.153) 135.738,77.832 137.015,77.832 cw(c137.015,77.153) 137.694,77.153 137.694,76.961 ccw(c138.119,76.961) 138.119,76.536 140.691,76.536 155.2,76.536 170.365,61.371 170.365,47.559 169.863,47.057 169.863,46.794 v1(169.809,46.741) ; T_J2.9@173.73,46.32 174.731,47.321 175.19,47.321 175.265,47.246 175.285,47.226 175.714,47.226 175.952,47.463 177.367,47.463 177.442,47.389 177.442,47.347 T_R61.2@177.668,47.121
EEM_IO.LVDS_N11: D1Q.6 IC20Q.5 T_J2.12 T_R62.2 | length 180
  L1 w0.127: IC20Q.5@35.215,76.733 35.215,76.458 35.095,76.338 35.095,75.823 34.96,75.688 34.96,75.321 35.034,75.247 35.209,75.247 35.395,75.433 v1(35.47,75.433)
  L4 w0.127: D1Q.6@34.968,75.91 34.968,75.775 35.054,75.689 35.113,75.689 35.369,75.433 v1(35.47,75.433) 35.545,75.433 35.731,75.247 36.462,75.247 36.526,75.247 ccw(c36.526,75.374) 36.653,75.374 36.653,75.468 cw(c36.778,75.468) 36.778,75.594 37.154,75.594 cw(c37.154,75.468) 37.28,75.468 37.28,75.374 ccw(c37.407,75.374) 37.407,75.247 37.777,75.247 75.12,75.247 76.933,73.434 81.474,73.434 81.665,73.434 ccw(c81.665,73.859) 82.09,73.859 82.09,73.885 cw(c82.769,73.885) 82.769,74.565 84.046,74.565 cw(c84.046,73.885) 84.725,73.885 84.725,72.745 ccw(c85.15,72.745) 85.15,72.32 86.427,72.32 ccw(c86.427,72.745) 86.852,72.745 86.852,73.885 cw(c87.531,73.885) 87.531,74.565 88.808,74.565 cw(c88.808,73.885) 89.487,73.885 89.487,72.745 ccw(c89.912,72.745) 89.912,72.32 91.189,72.32 ccw(c91.189,72.745) 91.614,72.745 91.614,73.885 cw(c92.293,73.885) 92.293,74.565 93.57,74.565 cw(c93.57,73.885) 94.249,73.885 94.249,72.745 ccw(c94.674,72.745) 94.674,72.32 95.951,72.32 ccw(c95.951,72.745) 96.376,72.745 96.376,72.755 cw(c97.055,72.755) 97.055,73.434 99.634,73.434 155.577,73.434 167.875,61.136 167.875,46.872 169.57,45.177 174.624,45.177 175.127,44.674 175.127,43.854 175.201,43.78 ; T_J2.12@176.27,43.78 175.201,43.78 ; T_R62.2@177.668,42.98 177.442,42.753 177.442,42.711 177.367,42.637 175.481,42.637 175.127,42.991 175.127,43.706 175.201,43.78
EEM_IO.LVDS_N12: D1S.6 IC20S.5 T_J2.15 T_R63.2 | length 181
  L1 w0.127: IC20S.5@35.215,69.869 35.215,69.594 35.095,69.474 35.095,68.959 34.96,68.824 34.96,68.457 35.034,68.383 35.209,68.383 35.395,68.569 v1(35.47,68.569) ; v1(170.28,38.907) 170.334,38.961 170.331,38.963 170.331,39.225 170.949,39.843 171.027,39.843 171.618,39.843 cw(c171.618,39.716) 171.745,39.716 171.745,39.486 ccw(c171.85,39.486) 171.85,39.38 172.167,39.38 ccw(c172.167,39.486) 172.272,39.486 172.272,39.716 cw(c172.399,39.716) 172.399,39.843 172.617,39.843 174.154,39.843 174.391,40.08 174.61,40.08 174.63,40.06 174.731,39.959 174.731,39.701 T_J2.15@173.73,38.7
  L4 w0.127: D1S.6@34.968,69.046 34.968,68.911 35.054,68.825 35.113,68.825 35.369,68.569 v1(35.47,68.569) 35.545,68.569 35.731,68.383 36.462,68.383 36.526,68.383 ccw(c36.526,68.51) 36.653,68.51 36.653,68.605 cw(c36.778,68.605) 36.778,68.73 37.154,68.73 cw(c37.154,68.605) 37.28,68.605 37.28,68.51 ccw(c37.407,68.51) 37.407,68.383 37.777,68.383 72.277,68.383 74.09,66.57 131.437,66.57 134.008,66.57 cw(c134.008,65.891) 134.688,65.891 134.688,65.529 ccw(c135.113,65.529) 135.113,65.104 136.389,65.104 ccw(c136.389,65.529) 136.815,65.529 136.815,66.9 cw(c137.494,66.9) 137.494,67.579 138.77,67.579 cw(c138.77,66.9) 139.45,66.9 139.45,65.529 ccw(c139.875,65.529) 139.875,65.104 141.151,65.104 ccw(c141.151,65.529) 141.577,65.529 141.577,66.9 cw(c142.256,66.9) 142.256,67.579 143.532,67.579 cw(c143.532,66.9) 144.212,66.9 144.212,65.529 ccw(c144.637,65.529) 144.637,65.104 145.913,65.104 ccw(c145.913,65.529) 146.339,65.529 146.339,65.891 cw(c147.018,65.891) 147.018,66.57 148.162,66.57 155.861,66.57 164.544,57.887 164.544,47.212 170.919,40.837 170.919,39.808 170.334,39.223 170.334,38.961 v1(170.28,38.907) ; T_J2.15@173.73,38.7 174.731,39.701 175.19,39.701 175.265,39.626 175.285,39.606 175.714,39.606 175.952,39.843 177.367,39.843 177.442,39.769 177.442,39.727 T_R63.2@177.668,39.501
EEM_IO.LVDS_N13: D1B.6 IC20B.5 T_J2.18 T_R64.2 | length 180
  L1 w0.127: IC20B.5@35.215,21.823 35.215,21.548 35.095,21.427 35.095,20.912 34.96,20.778 34.96,20.411 35.034,20.336 35.209,20.336 35.395,20.522 v1(35.47,20.522)
  L4 w0.127: D1B.6@34.968,21 34.968,20.865 35.054,20.778 35.113,20.778 35.369,20.522 v1(35.47,20.522) 35.545,20.522 35.731,20.336 36.462,20.336 36.526,20.336 ccw(c36.526,20.463) 36.653,20.463 36.653,20.558 cw(c36.778,20.558) 36.778,20.683 37.154,20.683 cw(c37.154,20.558) 37.28,20.558 37.28,20.463 ccw(c37.407,20.463) 37.407,20.336 37.777,20.336 74.012,20.336 74.666,20.99 74.669,20.99 75.836,22.158 83.986,22.158 84.177,22.158 ccw(c84.177,22.583) 84.602,22.583 84.602,23.008 cw(c85.281,23.008) 85.281,23.687 86.558,23.687 cw(c86.558,23.008) 87.237,23.008 87.237,21.443 ccw(c87.662,21.443) 87.662,21.017 88.939,21.017 ccw(c88.939,21.443) 89.364,21.443 89.364,23.008 cw(c90.043,23.008) 90.043,23.687 91.32,23.687 cw(c91.32,23.008) 91.999,23.008 91.999,21.443 ccw(c92.424,21.443) 92.424,21.017 93.701,21.017 ccw(c93.701,21.443) 94.126,21.443 94.126,23.008 cw(c94.805,23.008) 94.805,23.687 96.082,23.687 cw(c96.082,23.008) 96.761,23.008 96.761,21.443 ccw(c97.186,21.443) 97.186,21.017 98.463,21.017 ccw(c98.463,21.443) 98.888,21.443 98.888,23.008 cw(c99.567,23.008) 99.567,23.687 100.844,23.687 cw(c100.844,23.008) 101.523,23.008 101.523,21.443 ccw(c101.948,21.443) 101.948,21.017 103.225,21.017 ccw(c103.225,21.443) 103.65,21.443 103.65,23.008 cw(c104.329,23.008) 104.329,23.687 105.606,23.687 cw(c105.606,23.008) 106.285,23.008 106.285,21.443 ccw(c106.71,21.443) 106.71,21.017 107.987,21.017 ccw(c107.987,21.443) 108.412,21.443 108.412,21.478 cw(c109.091,21.478) 109.091,22.158 111.429,22.158 111.672,22.158 152.576,22.158 157.829,27.41 166.395,27.41 169.218,30.233 169.218,34.229 172.545,37.557 174.624,37.557 175.127,37.054 175.127,36.234 175.201,36.16 ; T_J2.18@176.27,36.16 175.201,36.16 ; T_R64.2@177.668,35.36 177.442,35.133 177.442,35.091 177.367,35.017 175.481,35.017 175.127,35.371 175.127,36.086 175.201,36.16
EEM_IO.LVDS_N14: D1D.3 IC20D.1 R131D.1 T_J2.21 T_R65.2 | length 181.7
  L1 w0.127: IC20D.1@40.38,25.328 40.38,24.345 v1(40.633,24.09) v1(40.633,24.09) 40.633,24.081 41.218,24.081 R131D.1@41.389,24.252 ; v1(167.045,31.375) 167.045,31.3 167.23,31.114 167.23,30.325 167.379,30.176 167.489,30.066 167.638,29.917 168.597,29.917 169.018,30.338 169.018,30.428 169.018,30.675 cw(c169.145,30.675) 169.145,30.802 169.146,30.802 ccw(c169.146,30.908) 169.252,30.908 169.252,31.224 ccw(c169.146,31.224) 169.146,31.329 169.145,31.329 cw(c169.145,31.456) 169.018,31.456 169.018,31.52 169.018,31.935 169.38,32.297 171.837,32.297 171.911,32.223 172.617,32.223 174.154,32.223 174.391,32.46 174.61,32.46 174.63,32.44 174.731,32.339 174.731,32.081 T_J2.21@173.73,31.08
  L4 w0.127: D1D.3@40.128,24.631 40.128,24.496 40.214,24.41 40.274,24.41 40.529,24.155 40.646,24.155 40.894,23.907 72.105,23.907 74.245,26.047 112.165,26.047 112.356,26.047 ccw(c112.356,26.472) 112.781,26.472 112.781,26.58 cw(c113.46,26.58) 113.46,27.259 114.737,27.259 cw(c114.737,26.58) 115.416,26.58 115.416,25.112 ccw(c115.841,25.112) 115.841,24.686 117.118,24.686 ccw(c117.118,25.112) 117.543,25.112 117.543,26.58 cw(c118.222,26.58) 118.222,27.259 119.499,27.259 cw(c119.499,26.58) 120.178,26.58 120.178,25.112 ccw(c120.603,25.112) 120.603,24.686 121.88,24.686 ccw(c121.88,25.112) 122.305,25.112 122.305,26.58 cw(c122.984,26.58) 122.984,27.259 124.261,27.259 cw(c124.261,26.58) 124.94,26.58 124.94,25.112 ccw(c125.365,25.112) 125.365,24.686 126.642,24.686 ccw(c126.642,25.112) 127.067,25.112 127.067,26.58 cw(c127.746,26.58) 127.746,27.259 129.023,27.259 cw(c129.023,26.58) 129.702,26.58 129.702,25.112 ccw(c130.127,25.112) 130.127,24.686 131.404,24.686 ccw(c131.404,25.112) 131.829,25.112 131.829,26.58 cw(c132.508,26.58) 132.508,27.259 133.785,27.259 cw(c133.785,26.58) 134.464,26.58 134.464,25.112 ccw(c134.889,25.112) 134.889,24.686 136.166,24.686 ccw(c136.166,25.112) 136.591,25.112 136.591,26.58 cw(c137.27,26.58) 137.27,27.259 138.547,27.259 cw(c138.547,26.58) 139.226,26.58 139.226,25.112 ccw(c139.651,25.112) 139.651,24.686 140.928,24.686 ccw(c140.928,25.112) 141.353,25.112 141.353,26.58 cw(c142.032,26.58) 142.032,27.259 143.309,27.259 cw(c143.309,26.58) 143.988,26.58 143.988,25.112 ccw(c144.413,25.112) 144.413,24.686 145.69,24.686 ccw(c145.69,25.112) 146.115,25.112 146.115,26.58 cw(c146.794,26.58) 146.794,27.259 148.071,27.259 cw(c148.071,26.58) 148.75,26.58 148.75,26.472 ccw(c149.175,26.472) 149.175,26.047 151.116,26.047 153.905,26.047 157.752,29.894 166.62,29.894 167.23,30.504 167.23,31.114 167.045,31.3 v1(167.045,31.375) ; T_J2.21@173.73,31.08 174.731,32.081 175.19,32.081 175.265,32.006 175.285,31.986 175.714,31.986 175.952,32.223 177.367,32.223 177.442,32.149 177.442,32.107 T_R65.2@177.668,31.881
EEM_IO.LVDS_N15: D1L.3 IC20L.1 R131L.1 T_J2.24 T_R66.1 | length 180.7
  L1 w0.127: IC20L.1@35.218,8.457 35.218,7.473 v1(35.47,7.219) v1(35.47,7.219) 35.47,7.21 36.056,7.21 R131L.1@36.226,7.381
  L4 w0.127: D1L.3@34.965,7.76 34.965,7.625 35.052,7.538 35.112,7.538 35.367,7.283 35.493,7.283 35.731,7.045 37.615,7.045 38.08,6.58 46.959,6.58 47.843,6.58 ccw(c47.843,7.005) 48.268,7.005 48.268,7.112 cw(c48.947,7.112) 48.947,7.792 50.224,7.792 cw(c50.224,7.112) 50.903,7.112 50.903,5.806 ccw(c51.328,5.806) 51.328,5.381 52.605,5.381 ccw(c52.605,5.806) 53.03,5.806 53.03,7.112 cw(c53.709,7.112) 53.709,7.792 54.986,7.792 cw(c54.986,7.112) 55.665,7.112 55.665,5.806 ccw(c56.09,5.806) 56.09,5.381 57.367,5.381 ccw(c57.367,5.806) 57.792,5.806 57.792,7.112 cw(c58.471,7.112) 58.471,7.792 59.748,7.792 cw(c59.748,7.112) 60.427,7.112 60.427,5.806 ccw(c60.852,5.806) 60.852,5.381 62.129,5.381 ccw(c62.129,5.806) 62.554,5.806 62.554,7.112 cw(c63.233,7.112) 63.233,7.792 64.51,7.792 cw(c64.51,7.112) 65.189,7.112 65.189,5.806 ccw(c65.614,5.806) 65.614,5.381 66.891,5.381 ccw(c66.891,5.806) 67.316,5.806 67.316,7.112 cw(c67.995,7.112) 67.995,7.792 69.272,7.792 cw(c69.272,7.112) 69.951,7.112 69.951,5.806 ccw(c70.376,5.806) 70.376,5.381 71.653,5.381 ccw(c71.653,5.806) 72.078,5.806 72.078,5.9 cw(c72.757,5.9) 72.757,6.58 72.948,6.58 79.349,6.58 82.307,9.537 154.045,9.537 159.479,14.971 163.679,14.971 172.15,23.443 172.15,29.199 172.888,29.937 174.624,29.937 175.127,29.434 175.127,28.614 175.201,28.54 ; T_J2.24@176.27,28.54 175.201,28.54 ; T_R66.1@177.668,27.74 177.442,27.513 177.442,27.471 177.367,27.397 175.481,27.397 175.127,27.751 175.127,28.466 175.201,28.54
EEM_IO.LVDS_N16: D1N.6 IC20N.5 T_J3.3 | length 176.3
  L1 w0.127: IC20N.5@35.215,56.142 35.215,55.867 35.095,55.746 35.095,55.231 34.96,55.097 34.96,54.73 35.034,54.655 35.209,54.655 35.395,54.841 v1(35.47,54.841)
  L4 w0.127: D1N.6@34.968,55.319 34.968,55.184 35.054,55.097 35.113,55.097 35.369,54.841 v1(35.47,54.841) 35.545,54.841 35.731,54.655 36.462,54.655 36.526,54.655 ccw(c36.526,54.782) 36.653,54.782 36.653,54.877 cw(c36.778,54.877) 36.778,55.002 37.154,55.002 cw(c37.154,54.877) 37.28,54.877 37.28,54.782 ccw(c37.407,54.782) 37.407,54.655 37.777,54.655 66.555,54.655 68.373,52.838 83.006,52.838 83.018,52.85 113.444,52.85 113.634,52.85 ccw(c113.634,53.276) 114.06,53.276 114.06,53.504 cw(c114.739,53.504) 114.739,54.184 116.015,54.184 cw(c116.015,53.504) 116.695,53.504 116.695,51.391 ccw(c117.12,51.391) 117.12,50.965 118.396,50.965 ccw(c118.396,51.391) 118.822,51.391 118.822,53.504 cw(c119.501,53.504) 119.501,54.184 120.777,54.184 cw(c120.777,53.504) 121.457,53.504 121.457,51.391 ccw(c121.882,51.391) 121.882,50.965 123.158,50.965 ccw(c123.158,51.391) 123.584,51.391 123.584,53.504 cw(c124.263,53.504) 124.263,54.184 125.539,54.184 cw(c125.539,53.504) 126.219,53.504 126.219,51.391 ccw(c126.644,51.391) 126.644,50.965 127.92,50.965 ccw(c127.92,51.391) 128.346,51.391 128.346,53.504 cw(c129.025,53.504) 129.025,54.184 130.301,54.184 cw(c130.301,53.504) 130.981,53.504 130.981,51.391 ccw(c131.406,51.391) 131.406,50.965 132.682,50.965 ccw(c132.682,51.391) 133.108,51.391 133.108,53.504 cw(c133.787,53.504) 133.787,54.184 135.063,54.184 cw(c135.063,53.504) 135.743,53.504 135.743,51.391 ccw(c136.168,51.391) 136.168,50.965 137.444,50.965 ccw(c137.444,51.391) 137.87,51.391 137.87,53.504 cw(c138.549,53.504) 138.549,54.184 139.825,54.184 cw(c139.825,53.504) 140.505,53.504 140.505,51.391 ccw(c140.93,51.391) 140.93,50.965 142.206,50.965 ccw(c142.206,51.391) 142.632,51.391 142.632,53.504 cw(c143.311,53.504) 143.311,54.184 144.587,54.184 cw(c144.587,53.504) 145.267,53.504 145.267,51.391 ccw(c145.692,51.391) 145.692,50.965 146.968,50.965 ccw(c146.968,51.391) 147.394,51.391 147.394,53.504 cw(c148.073,53.504) 148.073,54.184 149.349,54.184 cw(c149.349,53.504) 150.029,53.504 150.029,51.391 ccw(c150.454,51.391) 150.454,50.965 151.73,50.965 ccw(c151.73,51.391) 152.156,51.391 152.156,52.171 cw(c152.835,52.171) 152.835,52.85 155.721,52.85 156.752,52.85 156.816,52.85 ccw(c156.816,52.977) 156.943,52.977 156.943,53.143 cw(c157.068,53.143) 157.068,53.268 157.444,53.268 cw(c157.444,53.143) 157.57,53.143 157.57,52.977 ccw(c157.697,52.977) 157.697,52.85 158.081,52.85 159.358,52.85 159.873,53.366 159.873,54.364 160.11,54.601 160.11,54.82 160.09,54.84 159.989,54.941 159.731,54.941 T_J3.3@158.73,53.94